# Altium PCB Brain_Stim_Final_Layout.PcbDoc (part 2 of 3)
Units mil, origin at the board's own origin, x right, y up, seen from the top; angles counter-clockwise.
Board outline 3530 x 5285 mil, 4 copper layers (Top Layer, Layer 1, Layer 2, Bottom Layer), stack 62.449 mil thick; 148 components, 116 nets, 618 pads, 378 vias.
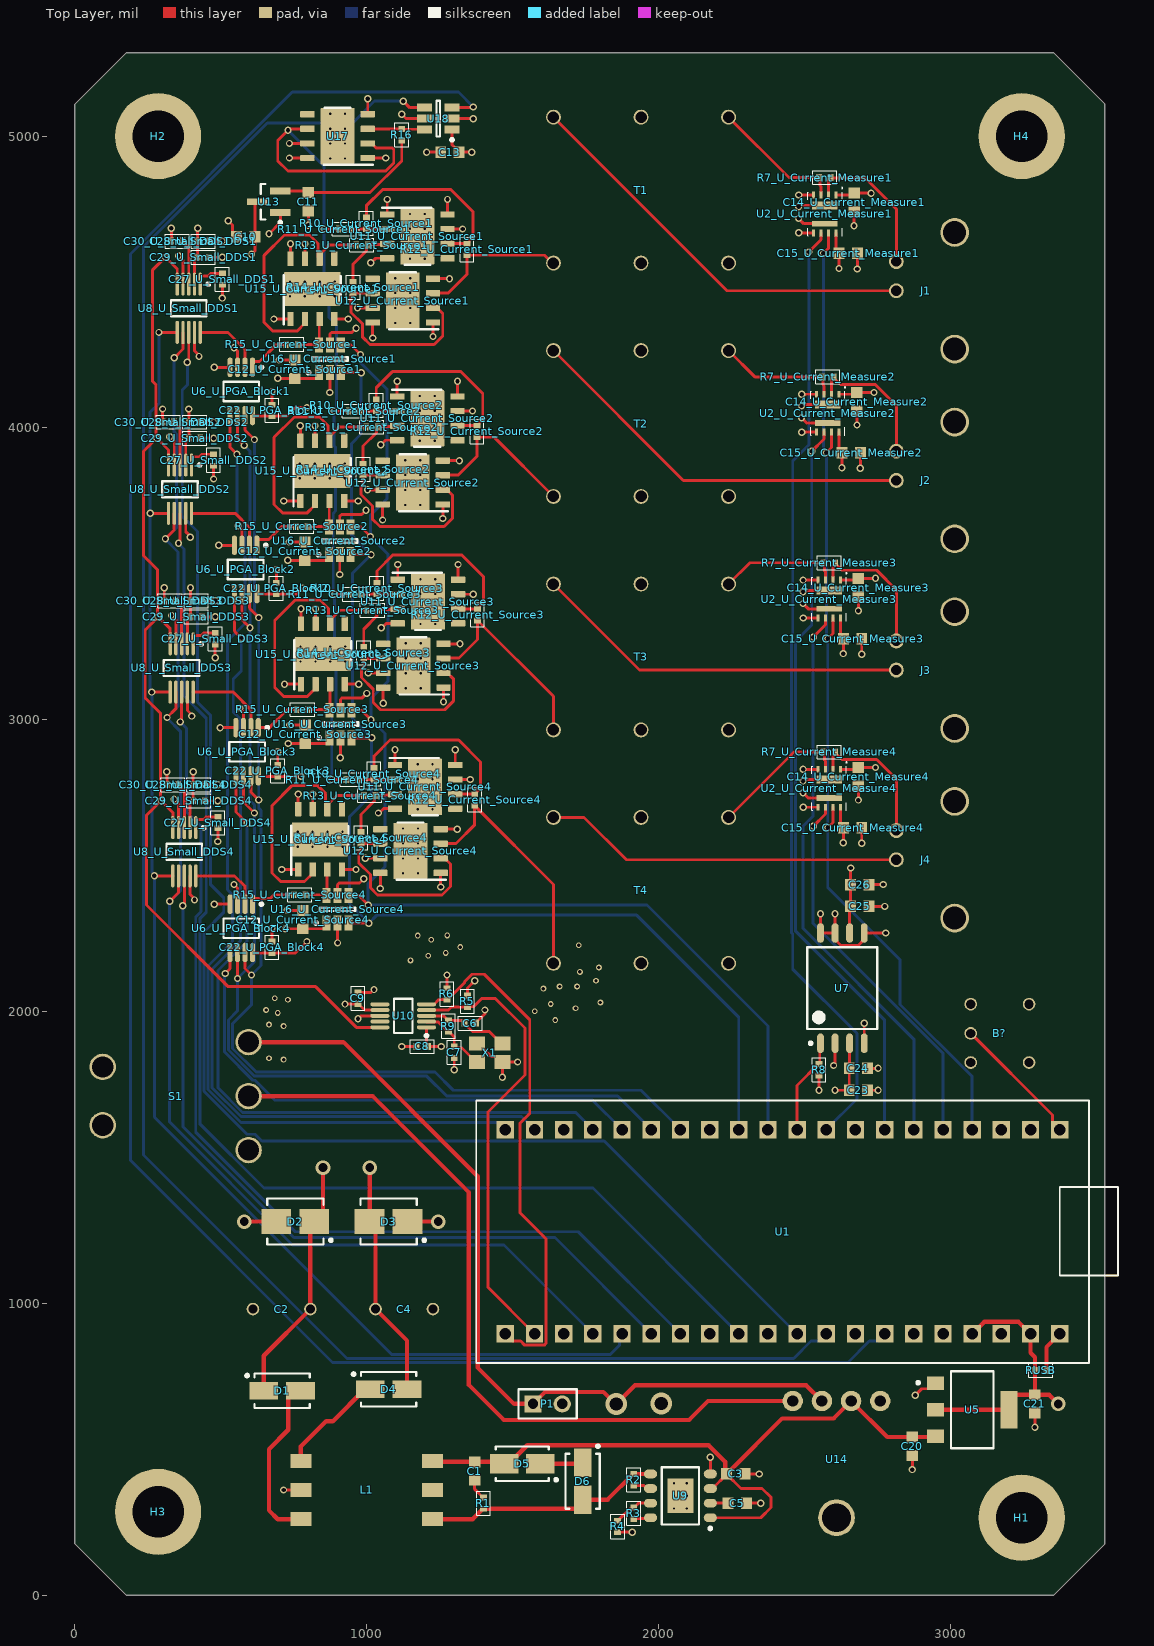
[diagram p0: Top Layer view]

## Via types
v1: diameter 25, hole 15, Top Layer to Bottom Layer, 234 vias
v2: diameter 19.68, hole 7.87, Top Layer to Bottom Layer, 58 vias
v3: diameter 19.68, hole 7.87, Top Layer to Bottom Layer, tented both sides, 52 vias
v4: diameter 19.68, hole 11.81, Top Layer to Bottom Layer, 27 vias
v5: diameter 50, hole 30, Top Layer to Bottom Layer, 5 vias
v6: diameter 75, hole 45, Top Layer to Bottom Layer, 2 vias

## Nets (pads, with @x,y where several pads share a name; then routed paths per layer and width w, separated by ;. In a path a pad name is that pad's centre, name@x,y a point inside that pad or via, vN(x,y) a via of type N, cw(c..) or ccw(c..) an arc to the next point about the centre after c; other vN are vias at no path point) (continued)
\V\_\I\S\O\_\E\N\: R8.2 U1.GP7 U7.1 | length 330.3
  Top Layer w10: U1.GP7@2475,1595 2475,1746.65 2550.53,1822.19 2552.5,1822.19 2552.5,1888.52 U7.1@2555,1891.02
\X\T\A\L\: C6.2 R9.2 U10.3 X1.3 | length 301.9
  Top Layer w10: U10.3@1204.72,1985 1262.72,1985 1278.03,1969.69 R9.2@1280,1969.69 1327.6,1969.69 1335.31,1961.97 C6.2@1335.31,1960 1335.31,1958.03 1362.44,1930.91 1420.16,1930.91 1461.06,1890 X1.3@1465,1890